# Altium PCB RemoteIMU.PcbDoc
Units mil, origin at the board's own origin, x right, y up, seen from the top; angles counter-clockwise.
Board outline 1063.02 x 728.38 mil, 4 copper layers (L1, L2, L3, L4), stack 64.6 mil thick; 19 components, 23 nets, 166 pads, 65 vias.
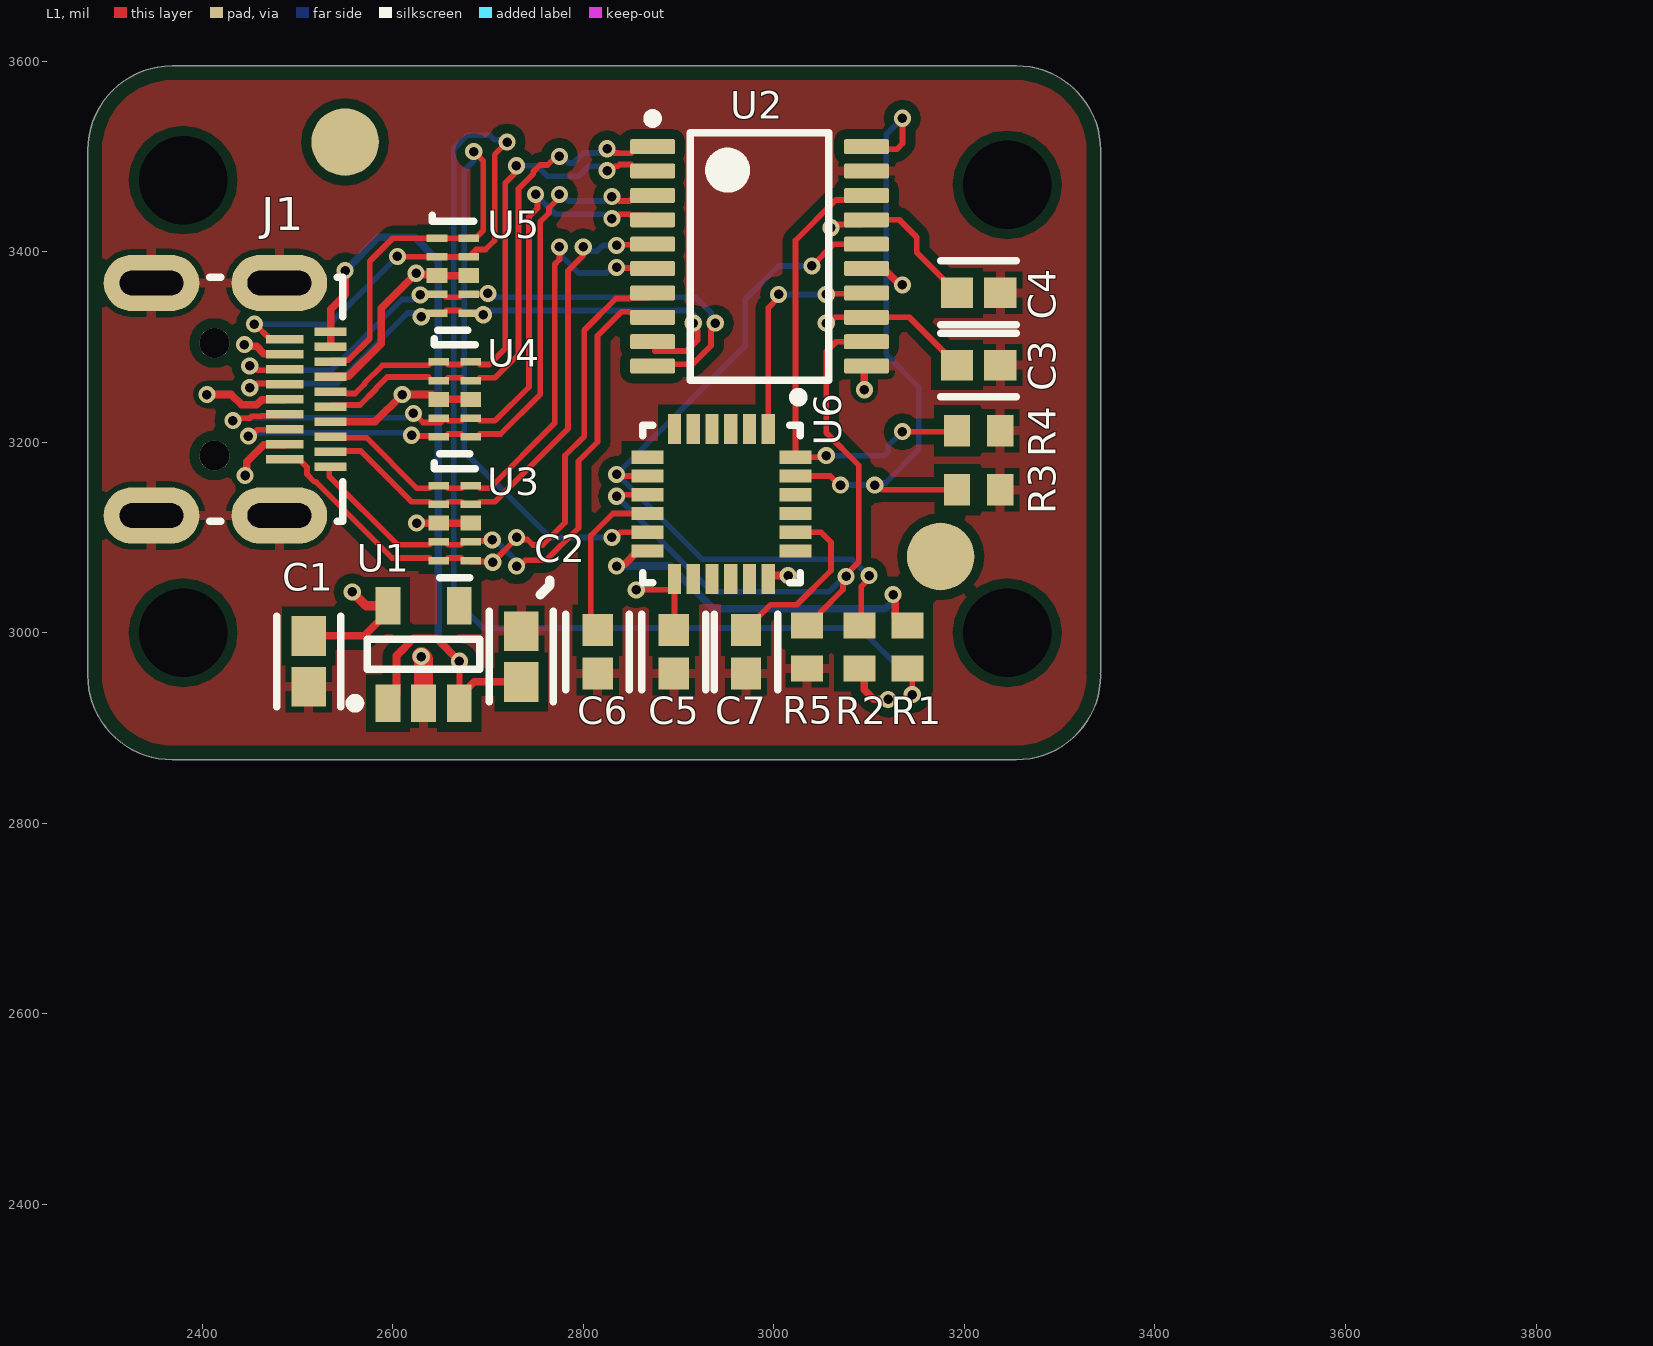
[diagram p0: L1 view]
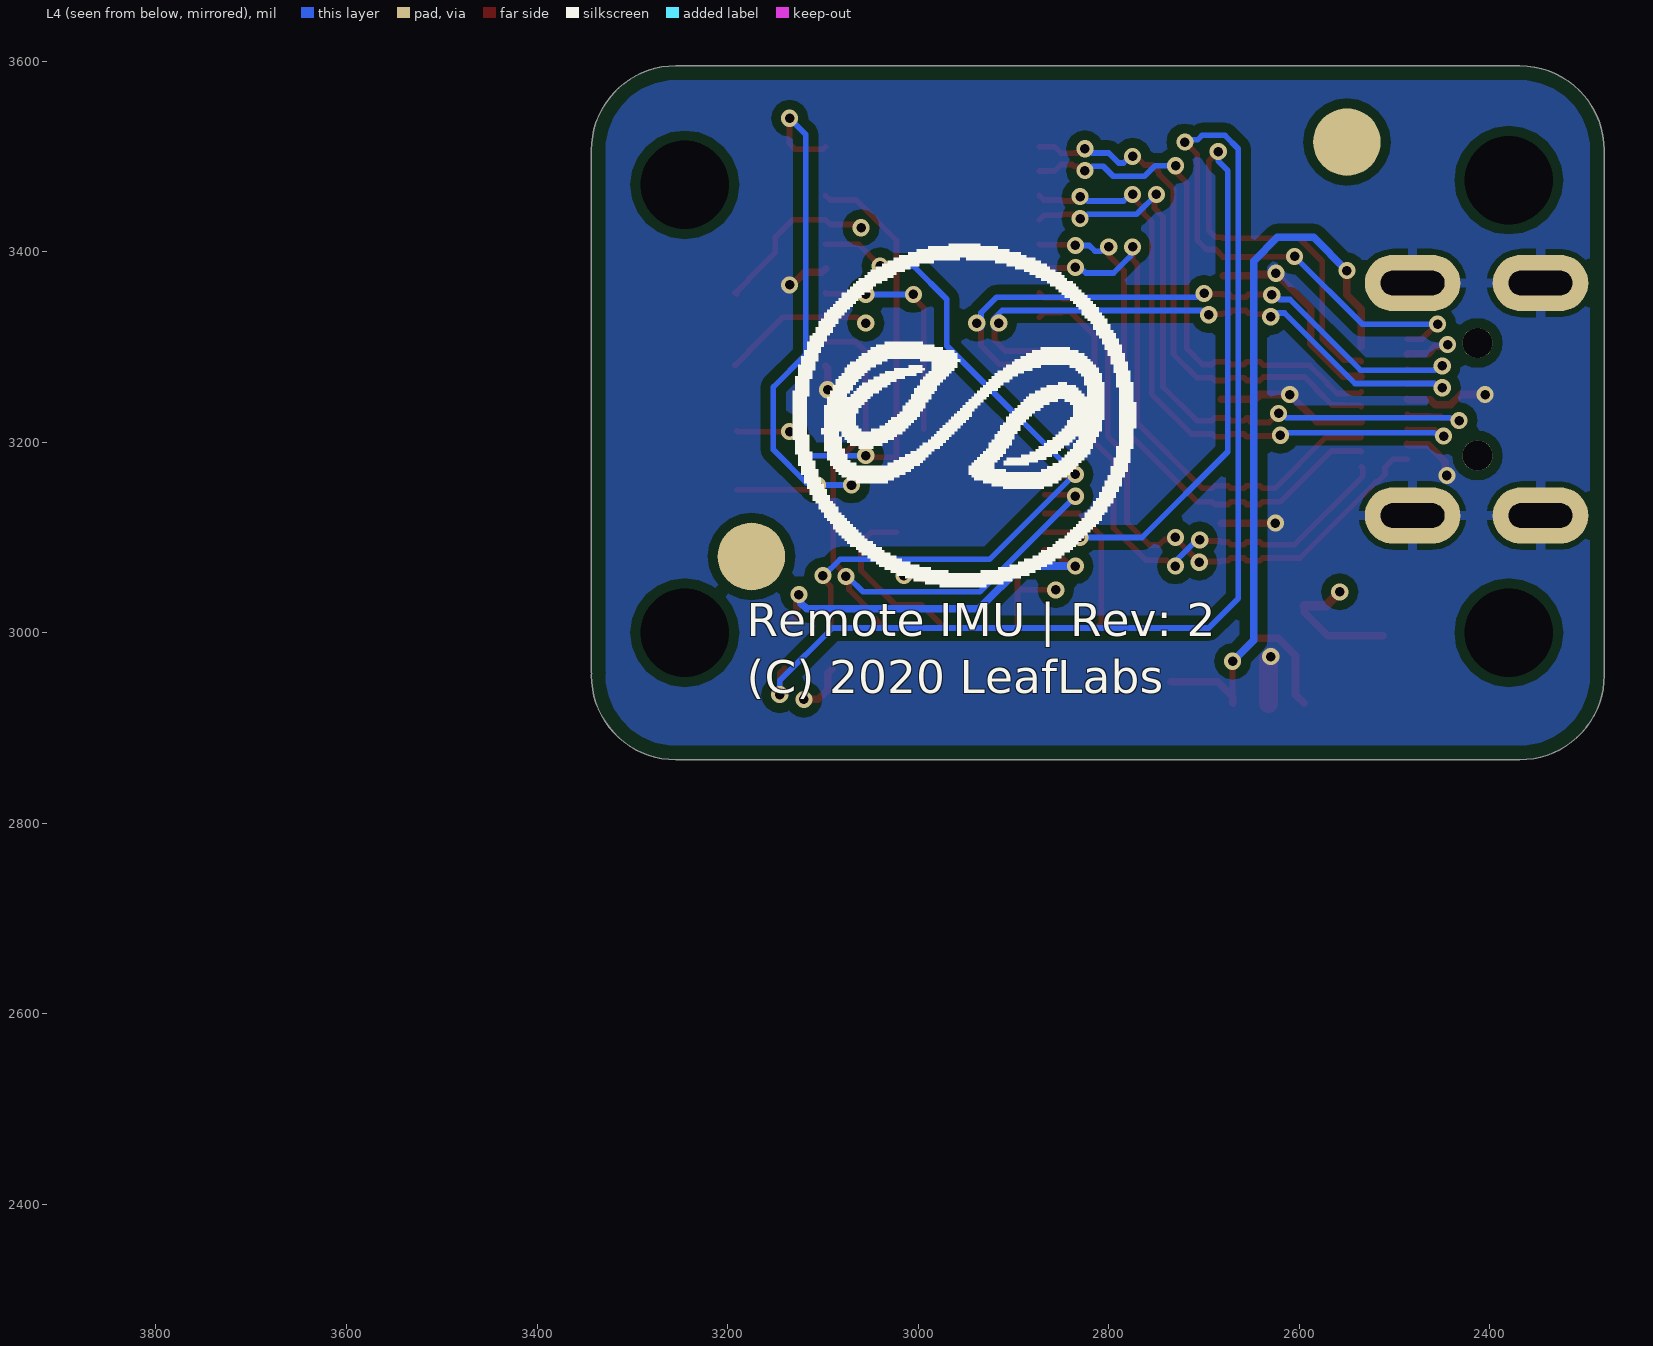
[diagram p1: L4 view, seen from below]
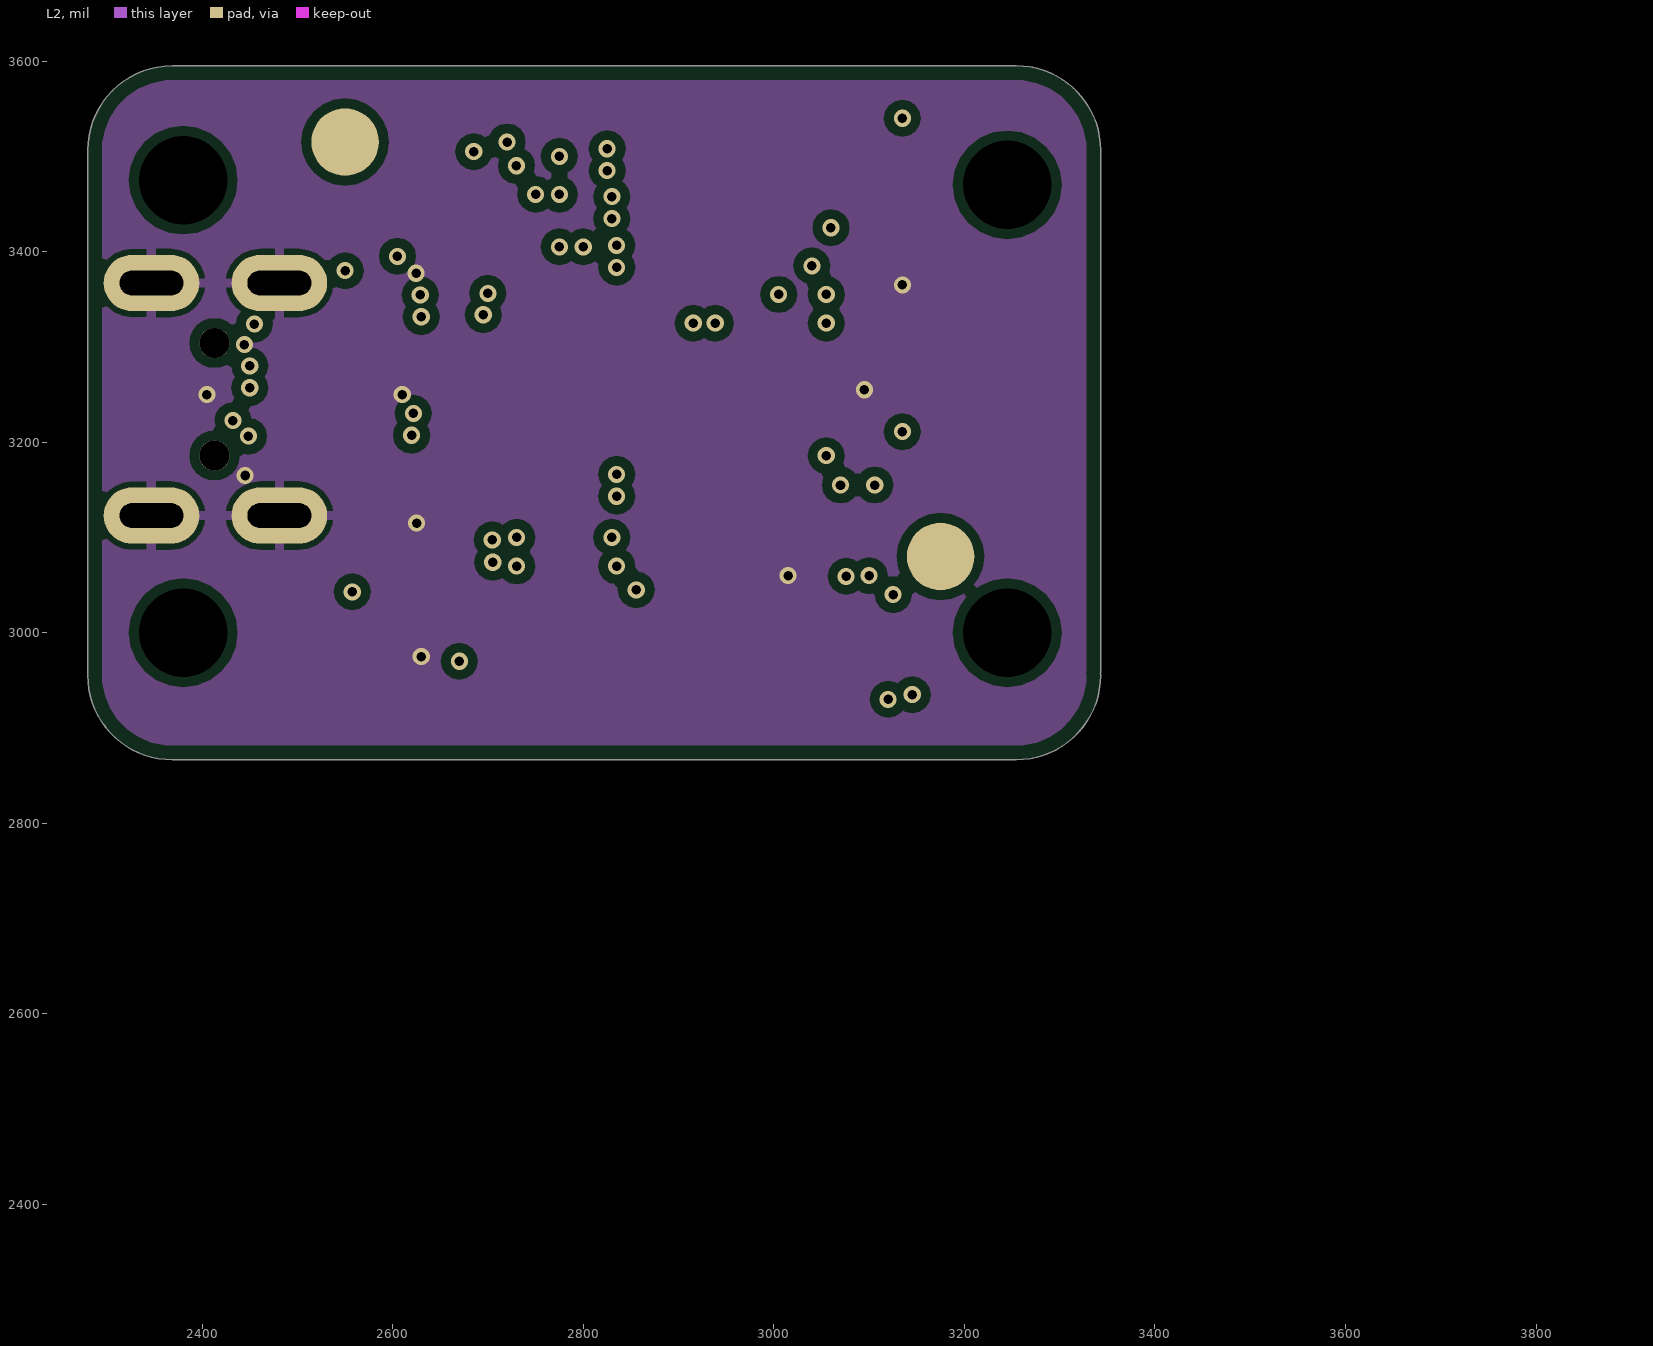
[diagram p2: L2]
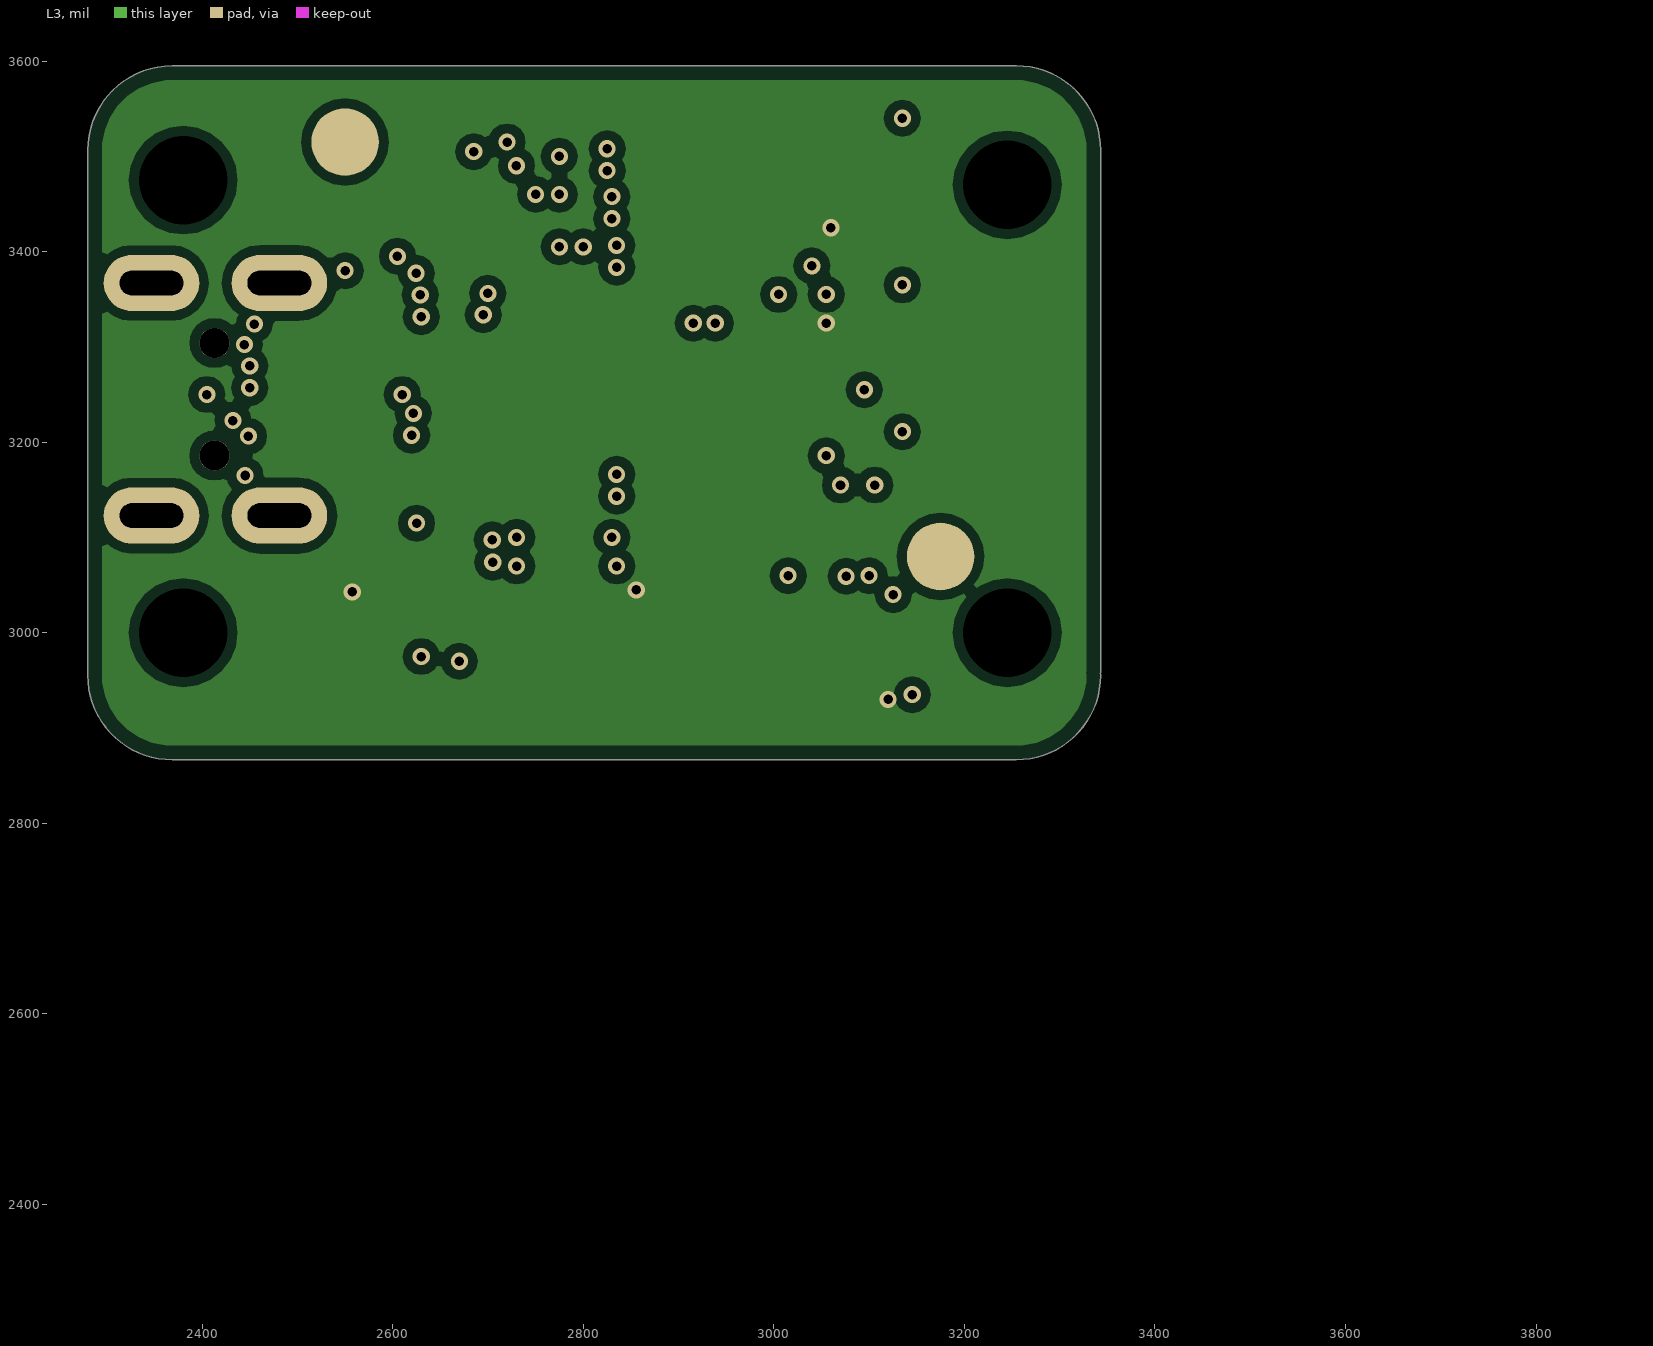
[diagram p3: L3]
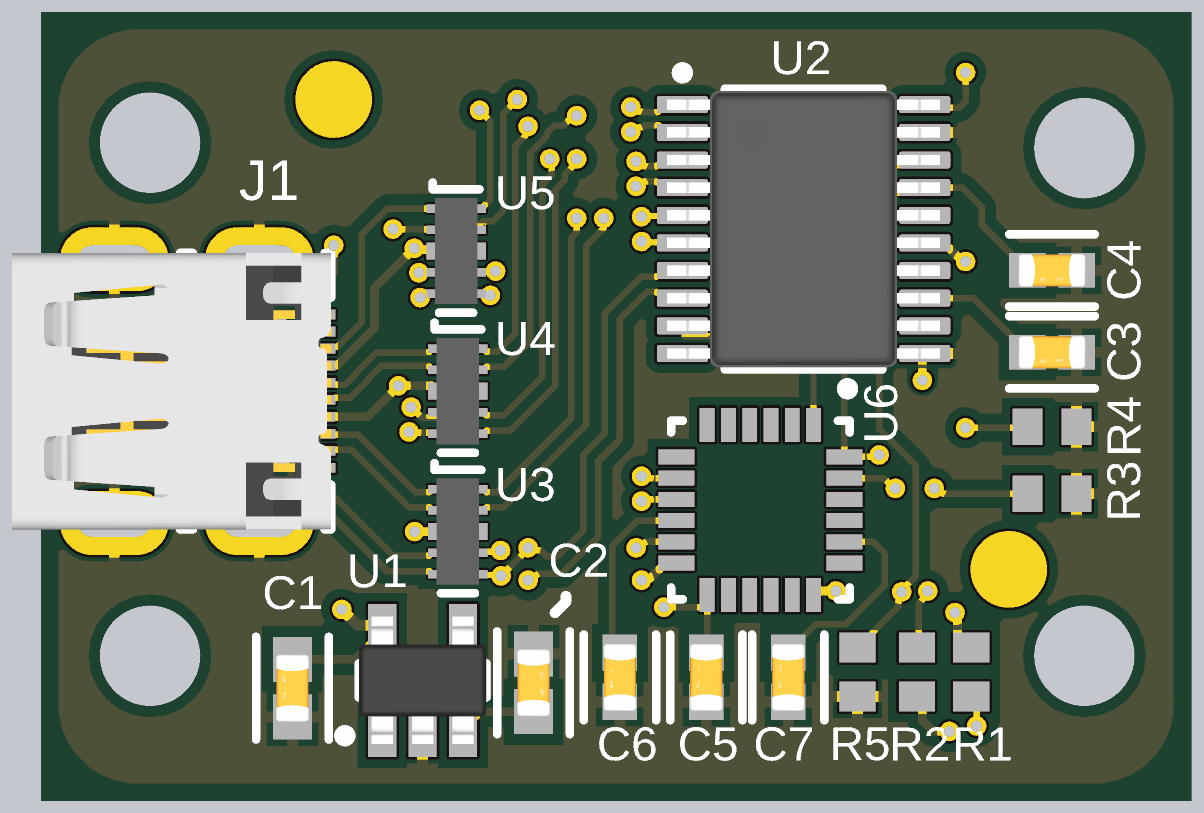
[diagram p4: 3D render of the assembled board from above, using the file's embedded part models]

## Layer stack, top to bottom
Top Solder: solder mask 0.1, Solder Resist, Dk 1
L1: signal copper 1.4
Prepeg0: dielectric 6.7, FR408, Dk 3.66
L2: signal copper 0.7
Core: dielectric 47, FR-4, Dk 3.66
L3: signal copper 0.7
Prepeg1: dielectric 6.7, FR408, Dk 3.66
L4: signal copper 1.4
Bottom Solder: solder mask 0.1, Solder Resist, Dk 1

## Board outline
2279.99,2955.24 cw(c2289.84,2955.24) 2280.18,2957.2 cw(c2289.85,2959.17) 2279.98,2959.17 2279.98,3502.42 cw(c2289.81,3502.48) 2280.18,3504.45 cw(c2289.58,3506.39) 2279.99,3506.42 cw(c2368.58,3506.42) 2368.58,3595.01 cw(c2368.59,3585.25) 2370.55,3594.82 cw(c2372.51,3585.24) 2372.52,3595.01 3254.41,3595.01 cw(c3254.41,3506.42) 3343.01,3506.42 3343.01,2959.23 cw(c3333.28,2959.16) 3342.81,2957.2 cw(c3333.26,2955.25) 3343.01,2955.24 cw(c3254.41,2955.23) 3254.41,2866.64 cw(c3254.41,2876.49) 3252.44,2866.84 cw(c3250.47,2876.48) 3250.47,2866.64 2372.52,2866.64 cw(c2372.52,2876.49) 2370.55,2866.84 cw(c2368.58,2876.48) 2368.58,2866.64 cw(c2368.58,2955.24)

## Design rules (kind name [scope] priority, off if disabled: settings)
BoardOutlineClearance [All] p1: gap=15 ignorepadtopadclearanceinfootprint=FALSE
Clearance "Clearance Polygons" [InPolygon] p1: gap=10 ignorepadtopadclearanceinfootprint=FALSE except(0: Arc-Hole Track-Hole SMDPad-Hole THPad-Hole Via-Hole Fill-Hole Poly-Hole Region-Hole Text-Hole)
Clearance [All] p2: gap=5 ignorepadtopadclearanceinfootprint=FALSE except(0: Arc-Hole Track-Hole SMDPad-Hole THPad-Hole Via-Hole Fill-Hole Poly-Hole Region-Hole Text-Hole)
ComponentClearance "HM-TRP & UFL" [InComponent('X1') vs InComponent('U1')] p1: gap=0 collisioncheckmode=3 verticalgap=0 showdistances=FALSE
ComponentClearance [All] p2: gap=1 collisioncheckmode=3 verticalgap=1 showdistances=FALSE
DiffPairsRouting [All] p1: maxlimit=393.7 minlimit=6 mostfreqgap=8 toplayer_minwidth=6 toplayer_maxwidth=15 toplayer_prefwidth=8 midlayer1_minwidth=6 midlayer1_maxwidth=15 midlayer1_prefwidth=8 midlayer2_minwidth=6 midlayer2_maxwidth=15 midlayer2_prefwidth=8 bottomlayer_minwidth=6 bottomlayer_maxwidth=15 bottomlayer_prefwidth=8 maxuncoupledlength=500
HoleSize [All] p1: absolutevalues=TRUE maxlimit=265 minlimit=10 maxpercent=80.000 minpercent=20.000
HoleToHoleClearance [All] p1: gap=10 allowstackedmicrovias=FALSE
MinimumAnnularRing [All] p1: minimumring=4
MinimumSolderMaskSliver [All] p1: minsoldermaskwidth=0
PlaneClearance [All] p1: clearance=10
PlaneConnect [All] p1: planeconnectstyle=Relief reliefexpansion=4 reliefentries=4 reliefconductorwidth=6 reliefairgap=6
PolygonConnect "Via connect style" [isVia] p1: connectstyle=Direct reliefconductorwidth=10 reliefentries=4 polygonreliefangle="90 Angle" airgapwidth=10
PolygonConnect [All] p2: connectstyle=Relief reliefconductorwidth=10 reliefentries=4 polygonreliefangle="90 Angle" airgapwidth=6
RoutingCorners [All] p1: cornerstyle=45-Degree minsetback=49.21 maxsetback=49.21
RoutingLayers [All] p1: top layer_v5=TRUE mid layer 1_v5=FALSE mid layer 2_v5=FALSE bottom layer_v5=TRUE
RoutingVias [All] p1: holewidth=12 width=22 viastyle="Through Hole" minholewidth=10 minwidth=18 maxholewidth=100 maxwidth=114
SilkToSilkClearance [All] p1: silktosilkclearance=0
SilkToSolderMaskClearance [IsPad] p1: minsilkscreentomaskgap=5 clearancetoexposedcopper=TRUE
SolderMaskExpansion [All] p1: expansion=2.5 istentingtop=FALSE
Width GND [InNet('GND')] p1: maxlimit=30 minlimit=8 preferedwidth=20 minimp=50.000000 maximp=50.000000 favimp=50.000000
Width Power [InNetClass('Power')] p2: maxlimit=40 minlimit=20 preferedwidth=30
Width 3V3 [InNetClass('3V3')] p3: maxlimit=30 minlimit=10 preferedwidth=20
Width [All] p4: maxlimit=400 minlimit=6 preferedwidth=8
19 further rules are at their usual default settings.

## Classes and differential pairs
differential pair D0: +D0_P -D0_N
differential pair D1: +D1_P -D1_N
differential pair D2: +D2_P -D2_N
differential pair REFCLK: +REFCLK_P -REFCLK_N
differential pair D3: +D3_P -D3_N

## Components (designator, comment, footprint, x,y, rotation, side; value= is the part's Value field where it differs from the comment)
C1 "1uF" FP-CC0603-DA-IPC_B 2511.83,2970 r270 top
C2 "1uF" FP-CC0603-DA-IPC_B 2735,2975 r90 top
C3 "0.1uF" FP-CC0603-DA-IPC_C 3215,3280.96 r0 top value="100 nF"
C4 "0.1uF" FP-CC0603-DA-IPC_C 3215,3356.77 r0 top value="100 nF"
C5 "0.1uF" FP-CC0603-DA-IPC_C 2895,2980 r270 top value="100 nF"
C6 "0.1uF" FP-CC0603-DA-IPC_C 2815,2980 r270 top value="100 nF"
C7 "2.2nF" FP-CC0603-DA-IPC_C 2970.81,2980 r270 top
J1 "685119248123" 685119248123 2400,3245 r270 top
R1 "22R" RESC1609X50X30LL10T20 3140.22,2985 r270 top
R2 "4.7k" RESC1609X50X30LL10T20 3090,2985 r270 top
R3 "4.7k" RESC1609X50X30LL10T20 3215,3150 r180 top
R4 "4.7k" RESC1609X50X30LL10T20 3215,3212.03 r180 top
R5 "4.7k" RESC1609X50X30LL10T20 3035,2985 r90 top
U1 "MIC5504-3.3YM5-TR" SOT-23-M5_V 2632.37,2977.18 r90 top
U2 "SN65LVDT14PW" PW0020A_L 2985,3395 r0 top
U3 "TPD4E02B04DQAR" DQA0010A 2665,3115 r0 top value=Value
U4 "TPD4E02B04DQAR" DQA0010A 2665,3245 r0 top value=Value
U5 "TPD4E02B04DQAR" DQA0010A 2663.27,3374.68 r0 top value=Value
U6 "MPU-6000" QFN-24_NoPad 2945,3135 r270 top

## Footprints (in the part's own frame and the unit in brackets; to place one, negate y for a bottom-side part, rotate by r counter-clockwise, add the part's x,y. Pads: shape width x height; smd on the part's side, far side on the other; paste and mask are expansions set on the pad)
685119248123 [mm] "Micro HDMI Horizontal SMT"
  rect 0.23x0.85 smd: 1(1.8,3.425) 3(1.4,3.425) 5(1,3.425) 7(0.6,3.425) 9(0.2,3.425) 11(-0.2,3.425) 13(-0.6,3.425) 15(-1,3.425) 17(-1.4,3.425) 19(-1.8,3.425)
  rect 0.23x1 smd: 2(1.6,2.2) 4(1.2,2.2) 6(0.8,2.2) 8(0.4,2.2) 10(0,2.2) 12(-0.4,2.2) 14(-0.8,2.2) 16(-1.2,2.2) 18(-1.6,2.2)
  round 0.81 hole 0.81 unplated: MH1(-1.5,0.33) MH2(1.5,0.33)
  oval 1.5x2.55 hole 0.65 slot 1.7 at 90 deg: Shell(-3.1,2.06) Shell(-3.1,-1.35) Shell(3.1,2.06) Shell(3.1,-1.35)
  silkscreen extent -3.25,0.2 3.25,3.75, body extent -3.25,-3.75 3.25,3.75, height 2.99
DQA0010A [mm]
  rect 0.55x0.2 smd paste+0 mask+0.051: 1(-0.425,1) 2(-0.425,0.5) 4(-0.425,-0.5) 5(-0.425,-1) 6(0.425,-1) 7(0.425,-0.5) 9(0.425,0.5) 10(0.425,1)
  rect 0.55x0.4 smd paste+0 mask+0.051: 3(-0.425,0) 8(0.425,0)
  silkscreen extent -0.55,-1.45 0.55,1.61, body extent -0.5,-1.25 0.5,1.25, height 0.55
FP-CC0603-DA-IPC_B [mil]
  rect 41.66x35.91 smd paste+0 mask+0: 1(-26.65,0) 2(26.65,0)
  silkscreen extent -47,-34 47,34, body extent -57,-28 57,28, height 10
FP-CC0603-DA-IPC_C [mil]
  rect 33.79x31.97 smd paste+0 mask+0: 1(-22.72,0) 2(22.72,0)
  silkscreen extent -40,-33 40,33, body extent -44,-22 44,22, height 10
PW0020A_L [mm] "SOP, 20-Leads, Body 6.6x4.5mm, Pitch 0.65mm, IPC High Density"
  rrect25% 1.2x0.4 smd: 1(-2.85,2.925) 2(-2.85,2.275) 3(-2.85,1.625) 4(-2.85,0.975) 5(-2.85,0.325) 6(-2.85,-0.325) 7(-2.85,-0.975) 8(-2.85,-1.625) 9(-2.85,-2.275) 10(-2.85,-2.925) 11(2.85,-2.925) 12(2.85,-2.275) 13(2.85,-1.625) 14(2.85,-0.975) 15(2.85,-0.325) 16(2.85,0.325) 17(2.85,0.975) 18(2.85,1.625) 19(2.85,2.275) 20(2.85,2.925)
  silkscreen extent -2.97,-3.3 1.85,3.8, body extent -3.21,-3.25 3.21,3.25, height 1
QFN-24_NoPad [mm] "QFN, 24-Leads, Body 4.00x4.00mm, Pitch 0.50mm"
  rect 0.8x0.35 smd: 1(-2,1.25) 2(-2,0.75) 3(-2,0.25) 4(-2,-0.25) 5(-2,-0.75) 6(-2,-1.25) 13(2,-1.25) 14(2,-0.75) 15(2,-0.25) 16(2,0.25) 17(2,0.75) 18(2,1.25)
  rect 0.35x0.85 smd: 7(-1.25,-1.975) 8(-0.75,-1.975) 9(-0.25,-1.975) 10(0.25,-1.975) 11(0.75,-1.975) 12(1.25,-1.975) 19(1.25,1.975) 20(0.75,1.975) 21(0.25,1.975) 22(-0.25,1.975) 23(-0.75,1.975) 24(-1.25,1.975)
  silkscreen extent -2.97,-2.1 2.1,2.18, body extent -2,-2 2,2, height 0.95
RESC1609X50X30LL10T20 [mm] "Chip Resistor, 2-Leads, Body 1.55x0.85mm, IPC High Density"
  rect 0.7x0.85 smd: 1(-0.575,0) 2(0.575,0)
  body extent -0.82,-0.48 0.82,0.48, height 0.5
SOT-23-M5_V [mm] "SOT-23, 5-Leads, Body 3x1.7mm, Pitch 0.95mm"
  rect 1x0.66 smd: 1(-1.3,0.95) 2(-1.3,0) 3(-1.3,-0.95) 4(1.3,-0.95) 5(1.3,0.95)
  silkscreen extent -1.42,-1.5 0.4,1.95, body extent -1.5,-1.5 1.5,1.5, height 1.45

## Part data
C1 C2: library part CAP-0603-1uF, "CAP CER 1UF X7R 0603", Supplier Part Number 1=1276-1036-1-ND, Category=Cap, ComponentLink2Description=Datasheet, ComponentLink2URL=http://www.yageo.com/documents/recent/UPY-GPHC_X7R_6.3V-to-50V_18.pdf, Device Class L2=Capacitors, Supplier 1=Digi-Key
C3 C4 C5 C6: library part CAP-0603-0.1uF, "CAP CER 0.1UF 16V X7R 0603", Capacitance="100 nF", Manufacturer=YAGEO, Manufacturer Part Number=CC0603KRX7R7BB104, Package=CC0603-DA, Supplier Part Number 1=311-1088-1-ND, Temperature="-55°C to +125°C", Temperature Characteristic=X7R, Temperature Coefficient=15%, Temperature Range High=+125°C, Temperature Range Low=-55°C, Tolerance=0.1, Voltage="16 V", Automotive=No, Category=Cap, ComponentLink2Description=Datasheet, ComponentLink2URL=http://www.yageo.com/documents/recent/UPY-GPHC_X7R_6.3V-to-50V_18.pdf, Device Class L1="Passive Components", Device Class L2=Capacitors, Device Class L3="Ceramic Capacitors", Digikey Description="CAP CER 0.1UF 16V X7R 0603", Footprint Url=http://www.yageo.com/exep/pages/download/literatures/UPY-C_GEN_24.pdf, Height=0.9mm, Lead Free=Yes, Material=Ceramic, Mouser Description="Multilayer Ceramic Capacitor, CC Series, 0.1 - F, - 10%, X7R, 16 V, 0603 [1608 Metric]", Octopart=https://octopart.com/cc0603krx7r7bb104-yageo-192941, RoHS=TRUE, Supplier 1=Digi-Key, Voltage Rating="16 V"
C7: library part CAP-0603-2.2nF, "CAP CER 2.2nF 50V X7R 0603", Supplier Part Number 1=311-1081-1-ND, Temperature Range High=+125°C, Tolerance=0.1, Voltage Rating="50 V", Category=Cap, ComponentLink2Description=Datasheet, ComponentLink2URL=http://www.yageo.com/documents/recent/UPY-GPHC_X7R_6.3V-to-50V_18.pdf, Device Class L2=Capacitors, Supplier 1=Digi-Key
J1: "Micro HDMI Type D Receptacle WR-COM, Horizontal, SMT", Contact Resistance=10mOhm, Manufacturer="Wurth Elektronik", Operating Temperature=-40to85degC, Rated Current=0.5A, Supplier Part Number 1=732-5254-1-ND, Working Voltage=40VAC, Connector Type=MicroHDMITypeD, Datasheet URL=https://katalog.we-online.de/em/datasheet/685119248123.pdf, Gender=Receptacle, Manufacturer URL=http://www.we-online.de, Mounting Technology=SMT, Orientation=Horizontal, Package Reference=685119248123, Packaging=TapeandReel, Part Number=685119248123, Publisher=WurthElektronik, Supplier 1=Digi-Key
R1: library part RES-0603-22R, "Resistor 0603 22 Ohm", Supplier Part Number 1=CR0603-JW-220ELFCT-ND, Supplier 1=Digi-Key
R2 R3 R4 R5: library part RES-0603-4.7k, "Resistor 0603 4.7k Ohm", Supplier Part Number 1=CR0603-JW-472ELFCT-ND, Supplier 1=Digi-Key
U1: "Single LDO, 2.5 to 5.5 V, Fixed Out 3.3 V, 0.3 A, -40 to 125 degC, 5-Pin SOT-23 (M5), RoHS, Tape and Reel", Case\/Package=SOT-23, Dropout Voltage=160mV, Manufacturer=Microchip, Max Input Voltage=5.5V, Max Operating Temperature=125degC, Min Current Limit=400mA, Min Input Voltage=2.5V, Min Operating Temperature=-40degC, Nominal Output Voltage=3.3V, Output Current=300mA, Package Description="5-Pin Small Outline Transistor, Body 1.6 x 2.9 mm, Pitch 0.95 mm", Supplier Part Number 1=576-4764-1-ND, Datasheet URL=http://ww1.microchip.com/downloads/en/DeviceDoc/MIC550X.pdf, Datasheet Version="Rev. 2.3, 04/2015", Lead Free=LeadFree, Manufacturer URL=http://www.microchip.com/, Mount=SurfaceMount, Mounting Technology=SurfaceMount, Number of Pins=5, Number of Regulators=1, Output Voltage=3.3V, Package Reference=SOT-23, Packaging=CutTape, REACH SVHC=NoSVHC, RoHSCompliant=True, Supplier 1=Digi-Key
U2: "SPI<>LVDS Transceiver, 1 Tx and 4 Rx, -55 to +125 degC, 20-pin TSSOP (PW), Green (RoHS & no Sb/Br)", Manufacturer="Texas Instruments", Supplier Part Number 1=296-12736-5-ND, ComponentLink1Description="Manufacturer URL", ComponentLink1URL=http://www.ti.com/, ComponentLink2Description=Datasheet, ComponentLink2URL=http://www.ti.com/general/docs/lit/getliterature.tsp?genericPartNumber=SN65LVDT14-EP&fileType=pdf, ComponentLink3Description="URL Link1", ComponentLink3URL=SamplesURL:http://www.ti.com/product/sn65lvdt14-ep#samples, DatasheetVersion=SCES633, Eco-Plan="Green (RoHS & no Sb/Br)", ESD HBM(kV)=12, ICC(Max)(mA)=25, Input Signal="LVDS, LVTTL", Mounting Technology="Surface Mount", No. of Rx=4, No. of Tx=1, Output Signal="LVDS, LVTTL", PackageDescription="20-Pin Plastic Thin Small Outline Package 6.5 x 4.4 mm Body ,0.65 mm Pitch", PackageReference=PW0020A, PackageVersion="revG, Feb-2011", PartNumber=SN65LVDT14PW, Part-to-Part Skew(Max)(ps)=1000, Signaling Rate(Mbps)=125, SubFamily="LVDS PHY (<800Mbps)", Supplier 1=Digi-Key
U3 U4 U5: "4 Channel TVS Avalanch diode for USB3/HDMI2.0 protection", Manufacturer="Texas Instruments", Supplier Part Number 1=296-43875-1-ND, CompType=IC, Copyright="Copyright (C) 2018 Accelerated Designs. All rights reserved", MountType=SMT, PackageReference=DQA0010A, Part Number=TPD4E02B04DQAR, PartNumber=TPD4E02B04DQAR, PIN_COUNT=10, RefDes=RefDes, RoHS=Y, Supplier 1=Digi-Key, Type=DEV
U6: "3-Axis Gyroscope 3-Axis Accelerometer Motion Processing Unit with I2C and SPI, 2.5, 3 or 3.3 V, -40 to 85 degC, 24-Pin QFN, RoHS, Tape and Reel", Manufacturer=InvenSense, Operating Temperature=-40degC~85degC(TA), Package Description="24-Pin Quad Flat No-lead Package, Body 4 x 4 mm, Pitch 0.5 mm", Package Reference=QFN-24, Standard Package=5,000, Supplier Part Number 1=1428-1005-1-ND, Category=Sensors,Transducers, Datasheet URL=https://www.invensense.com/wp-content/uploads/2015/02/MPU-6000-Datasheet1.pdf, Datasheet Version="Rev. 3.4, 08/2013", Family=Multifunction, Featured Product=MPU60006AxisIntegratedSPISolution, Manufacturer URL=http://www.invensense.com/, Online Catalog=MPU-6000™Series, Other Names="1428-1005-2 / MPU6000", Output Type=I²C,SPI, Sensor Type=Accelerometer,Gyroscope,3Axis, Supplier 1=Digi-Key

## Free pads (board coordinates)
  round 13.78 on Mech2: 1(2289.84,2325.31) 1(2289.84,2404.06) 1(2289.84,2404.06) 1(2289.84,2404.06) 1(2289.84,2870.59) 1(2368.58,2377.81) 1(2368.58,2430.3) 1(2543.78,2404.06) 1(3059.5,2404.06) 1(3254.41,2377.81) 1(3254.41,2430.3) 1(3333.15,2325.31) 1(3333.15,2404.06) 1(3333.15,2404.06) 1(3333.15,2404.06) 1(3333.15,2870.59) 1(3342.99,2876.5) 1(3342.99,3585.16) 1(3759.66,2955.24) 1(3759.66,3506.42) 1(3785.91,2876.5) 1(3785.91,2876.5) 1(3785.91,2876.5) 1(3785.91,3047.23) 1(3785.91,3434.43) 1(3785.91,3585.16) 1(3785.91,3585.16) 1(3785.91,3585.16) 1(3812.15,2955.24) 1(3812.15,3506.42) 1(3864.65,2876.5) 1(3864.65,3585.16)
  round 70.87 hole 93 unplated: 3(2380,3000) 3(2380,3475) 3(3245,3000) 3(3245,3470)
  round 70.87 all layers, no hole: Fiducial(2550,3515) Fiducial(3175,3080)

## Via types
v1: diameter 18, hole 10, L1 to L4, 65 vias

## Nets (pads, with @x,y where several pads share a name; then routed paths per layer and width w, separated by ;. In a path a pad name is that pad's centre, name@x,y a point inside that pad or via, vN(x,y) a via of type N, cw(c..) or ccw(c..) an arc to the next point about the centre after c; other vN are vias at no path point)
3v3: C1.1 C3.1 C4.1 C5.1 R2.2 U1.5 U2.13 U2.17 U6.13 | length 633.5
  L1 w6: v1(2855.63,3045) 2891.9,3045 U6.13@2895.79,3048.89 ; C5.1 2895.79,3003.5 U6.13@2895.79,3048.89 ; U6.13 U6.13@2895.79,3048.89 ; v1(3055,3325) 3058.25,3325 3064.27,3331.02 U2.13 3142.22,3331.02 3178.39,3294.85 3178.39,3293.94 3191.38,3280.96 C3.1 ; v1(3060,3425) 3063.25,3425 3066.76,3428.51 3092.33,3428.51 U2.17 3131.61,3433.39 3150,3415 3150,3399.05 3178.39,3370.66 3178.39,3369.76 3191.38,3356.77 C4.1 C4.1@3190.67,3355.16
  L1 w8: C1.1 2569.96,2996.65 2594.97,3021.67 U1.5 ; R2.2 3095,2957.36 3095,2940 3105,2930 v1(3120,2930)
  L1 w10: v1(2557.59,3042.9) 2572.12,3028.36 U1.5
+5: C2.1 J1.17 J1.19 U1.1 U1.3 | length 890.7
  L1 w6: U1.3@2670,2932.92 v1(2670,2970)
  L1 w8: J1.17 J1.19 2534.84,3339.49 2550,3354.65 v1(2550,3380) ; U1.1 2603.96,2934.99 2603.96,2975.83 2622.13,2994 2646,2994 v1(2670,2970) ; U1.3 2669.77,2932.69 2670,2932.92 2685.43,2948.35 C2.1
  L4 w8: v1(2550,3380) 2585,3415 2623,3415 2648,3390 2648,2992 v1(2670,2970)
D0_N: J1.5 U2.6 U3.1 U3.10 | length 594.3
  L1 w6: J1.5 2535.72,3204.76 2572.34,3204.76 2625.57,3151.53 2638.54,3151.53 2641.38,3154.37 U3.1 2655.16,3154.37 2658,3151.53 2672,3151.53 2674.84,3154.37 U3.10 2688.62,3154.37 2691.46,3151.53 2701.56,3151.53 2770,3219.97 2770,3386.75 2775,3391.75 v1(2775,3405) ; v1(2835,3383.5) 2835.65,3382.85 2872.15,3382.85 U2.6
  L4 w6: v1(2775,3405) 2777,3403 2777,3395.47 2794.97,3377.5 2824.01,3377.5 2825.78,3379.27 2827.52,3379.27 2831.75,3383.5 v1(2835,3383.5)
D0_P: J1.3 U2.5 U3.2 U3.9 | length 583.2
  L1 w6: J1.3 2535.72,3190.76 2566.54,3190.76 2619.77,3137.53 2638.54,3137.53 2641.38,3134.69 U3.2 2655.16,3134.69 2658,3137.53 2672,3137.53 2674.84,3134.69 U3.9 2688.62,3134.69 2691.46,3137.53 2707.36,3137.53 2784,3214.17 2784,3380 2800,3396 v1(2800,3405) ; v1(2835,3406.5) 2835.65,3407.15 2872.15,3407.15 U2.5
  L4 w6: v1(2800,3405) 2803.25,3405 2807.75,3400.5 2814.49,3400.5 2820.49,3406.5 v1(2835,3406.5)
D1_N: J1.8 U2.4 U4.4 U4.7 | length 739.8
  L1 w6: v1(2432.34,3222.66) 2434.64,3224.95 2449.88,3224.95 2452.05,3227.12 2462.43,3227.12 2463.03,3227.72 2485.09,3227.72 J1.8 ; v1(2621.66,3230.18) 2622.06,3230.18 2631.67,3220.56 2650.39,3220.56 2653.9,3224.08 2653.9,3225.32 2655.16,3225.32 2658,3222.47 2672,3222.47 2674.84,3225.32 U4.7 2688.62,3225.32 2691.46,3222.47 2707.47,3222.47 2743,3258 2743,3436.49 2752.03,3445.51 2752.03,3457.97 v1(2750,3460) ; v1(2830,3434.68) 2833.25,3434.68 2837.75,3439.18 2848.66,3439.18 2849.58,3438.26 2867.92,3438.26 U2.4
  L4 w6: v1(2432.34,3222.66) 2434.64,3224.95 2441.1,3224.95 2441.86,3225.71 2613.95,3225.71 2618.41,3230.18 v1(2621.66,3230.18) ; v1(2750,3460) 2770.82,3439.18 2822.25,3439.18 2826.75,3434.68 v1(2830,3434.68)
D1_P: J1.6 U2.3 U4.5 U4.6 | length 696.3
  L1 w6: v1(2448.6,3206.39) 2451.2,3206.39 2457.93,3213.12 2486.23,3213.12 J1.6 ; v1(2619.77,3207.25) 2620.47,3206.56 2647.34,3206.56 U4.5 2655.16,3205.63 2658,3208.47 2672,3208.47 2674.84,3205.63 U4.6 2688.62,3205.63 2691.46,3208.47 2713.27,3208.47 2755,3250.2 2755,3431.51 2764.03,3440.54 2764.03,3445.78 2775,3456.75 v1(2775,3460) ; v1(2830,3457.68) 2833.25,3457.68 2837.75,3453.18 2848.66,3453.18 2849.58,3454.1 2867.92,3454.1 U2.3
  L4 w6: v1(2448.6,3206.39) 2450.9,3208.69 2456.81,3208.69 2458.12,3210 2613.78,3210 2616.53,3207.25 v1(2619.77,3207.25) ; v1(2775,3460) 2777.7,3460 2784.51,3453.18 2822.25,3453.18 2826.75,3457.68 v1(2830,3457.68)
D2_N: J1.11 U2.2 U4.1 U4.10 | length 566
  L1 w6: J1.11 2536.37,3251.35 2551.63,3251.35 2551.89,3251.08 2560.57,3251.08 2570.56,3261.07 2570.56,3262.03 2589.14,3280.61 2637.62,3280.61 2641.38,3284.37 U4.1 2655.16,3284.37 2658,3281.53 2672,3281.53 2674.84,3284.37 U4.10 2688.62,3284.37 2691.46,3281.53 2701.56,3281.53 2718,3297.97 2718,3471.84 2727.61,3481.45 2727.61,3487.8 v1(2729.9,3490.1) ; v1(2825,3485) 2828.25,3485 2832.75,3489.5 2836.54,3489.5 2838.4,3491.36 2850.25,3491.36 2857.05,3484.57 U2.2 U2.2@2871.93,3483.7
  L4 w6: v1(2729.9,3490.1) 2751.53,3490.1 2762.63,3479 2795.28,3479 2805.78,3489.5 2817.25,3489.5 2821.75,3485 v1(2825,3485)
D2_P: J1.9 U2.1 U4.2 U4.9 | length 569.9
  L1 w6: J1.9 2536.37,3238.65 2551.63,3238.65 2551.89,3238.92 2565.62,3238.92 2582.72,3256.02 2582.72,3256.99 2594.18,3268.44 2637.62,3268.44 2641.38,3264.69 U4.2 2655.16,3264.69 2658,3267.53 2672,3267.53 2674.84,3264.69 U4.9 2688.62,3264.69 2691.46,3267.53 2707.36,3267.53 2732,3292.17 2732,3466.04 2747.43,3481.47 2747.43,3483.75 2754.5,3490.82 2762.58,3490.82 2771.75,3500 v1(2775,3500) ; v1(2825,3508) 2828.25,3508 2832.75,3503.5 2836.54,3503.5 2836.68,3503.36 2850.25,3503.36 2857.05,3510.16 U2.1
  L4 w6: v1(2775,3500) 2777.51,3500 2784.51,3493 2789.49,3493 2799.99,3503.5 2817.25,3503.5 2821.75,3508 v1(2825,3508)
D3_N: J1.14 U2.10 U5.4 U5.7 | length 664.6
  L1 w6: v1@2457.75,3275.62 2485.74,3275.62 J1.14 ; v1(2628.85,3354.61) 2629.24,3355 2653.43,3355 2656.27,3352.16 2670.27,3352.16 2673.11,3355 U5.7 2680.57,3355.57 2699.32,3355.57 v1(2699.88,3356.13) ; U2.10@2875,3281 2875.72,3281.72 2914.51,3281.72 2934,3301.2 2934,3317.25 2938.5,3321.75 v1(2938.5,3325)
  L4 w6: v1(2450,3280.12) 2453.25,3280.12 2457.75,3275.62 2535.82,3275.62 2609.83,3349.63 2620.62,3349.63 ; v1(2699.88,3356.13) 2703.13,3356.13 2707.14,3352.12 2917.68,3352.12 2934,3335.8 2934,3320 2938.5,3324.5 v1(2938.5,3325)
D3_P: J1.12 U2.9 U5.5 U5.6 | length 610.8
  L1 w6: v1@2457.75,3261.62 2485.74,3261.62 J1.12 ; v1(2630,3331.64) 2633.25,3331.64 2635.99,3334.38 2645.6,3334.38 U5.5 2653.43,3335.31 2656.27,3338.16 2670.27,3338.16 2673.11,3335.31 U5.6 2680.83,3334.49 2694.17,3334.49 v1(2695,3333.66) ; 2875,3295.72 2908.72,3295.72 2920,3307 2920,3317.25 2915.5,3321.75 v1(2915.5,3325)
  L4 w6: v1(2450,3257.12) 2453.25,3257.12 2457.75,3261.62 2541.62,3261.62 2615.63,3335.63 v1@2622.88,3335.63 ; v1(2695,3333.66) 2698.25,3333.66 2702.71,3338.12 2911.88,3338.12 v1@2920,3330 ; v1(2915.5,3325) 2915.5,3324.5 v1@2920,3320
FSYNC: J1.15 U5.1 U5.10 U6.11 | length 902.8
  L1 w6: J1.15 2536.37,3285.9 2553.2,3285.9 2575.82,3308.52 2575.82,3389.86 2600.01,3414.05 U5.1 U5.10 2680.94,3414.99 2687.83,3414.99 2695,3422.16 2695,3495 v1(2685,3505) ; v1(2830,3100) 2833.25,3100 2838.72,3105.47 U6.11
  L4 w6: v1(2685,3505) 2685,3495 2675,3485 2675,3190 2765,3100 v1(2830,3100)
GND: C1.2 C2.2 C3.2 C4.2 C5.2 C6.2 C7.2 J1.4 J1.7 J1.10 J1.13 J1.16 J1.Shell R3.1 R4.1 R5.1 U1.2 U2.11 U2.15 U2.19 U3.3 U3.8 U4.3 U4.8 U5.3 U5.8 U6.18 | length 772.2
  L1 w8: v1(2405,3250) 2430.46,3250 2441.33,3239.12 2457.46,3239.12 2462.81,3244.47 2486.09,3244.47 J1.10 ; v1(2444.39,3302.43) 2446.3,3300.51 2457.15,3300.51 2464.89,3292.77 2486.09,3292.77 J1.16 ; v1(2445,3165) 2446.91,3166.91 2446.91,3179.25 2464.89,3197.23 2486.09,3197.23 J1.4 ; J1.7 2581.38,3221.38 v1(2610,3250) 2641.22,3250 2647.25,3243.98 U4.3 U4.8 ; J1.13 2535.37,3269.15 2553.61,3269.15 2587.82,3303.36 2587.82,3340.44 v1(2624.58,3377.21) 2625.85,3375.95 2645.27,3375.95 U5.3 U5.8 ; v1(2625,3115) U3.8 ; U6.18 2994.21,3057.11 2997.1,3060 v1(3015,3060) ; v1(3095,3255) 3095,3277.64 U2.11 ; U2.15 3101.08,3378.33 3118.96,3378.33 3132.29,3365 v1(3135,3365)
  L1 w20: v1(2630,2975) 2632.37,2972.63 U1.2
NetC6_1: C6.1 U6.10 | length 171
  L1 w6: C6.1 2808,3009.72 2808,3102.04 2831.12,3125.16 U6.10
NetC7_1: C7.1 U6.20 | length 186.9
  L1 w6: C7.1 2970.81,3003.62 2996.61,3029.42 3024.15,3029.42 3060,3065.27 3060,3095 3049.53,3105.47 U6.20
NetR1_1: R1.1 U6.12 | length 398.2
  L1 w8: v1(2835,3070) 2836.91,3071.91 2843.53,3071.91 2857.4,3085.79 U6.12 ; v1(3125.22,3040) 3125.22,3037.29 3127.49,3035.03 3127.49,3017.42 3137.27,3007.64 R1.1
  L4 w8: v1(2835,3070) 2891.21,3070 2936.21,3025 3117.15,3025 3123.31,3031.16 3123.31,3038.09 v1(3125.22,3040)
REFCLK: U2.14 U6.1 | length 238.6
  L1 w6: U6.1 2994.21,3340.96 3005,3351.75 v1(3005,3355) ; v1(3055,3355) 3055.81,3355.81 3096.4,3355.81 U2.14
  L4 w6: v1(3005,3355) v1(3055,3355)
REFCLK_N: J1.1 U2.8 U3.4 U3.7 | length 617.7
  L1 w6: J1.1 2533.47,3172.77 2533.47,3164.12 2605.12,3092.47 2638.54,3092.47 2641.38,3095.32 U3.4 2655.16,3095.32 2658,3092.47 2672,3092.47 2674.84,3095.32 U3.7 2682.67,3096.25 2703.24,3096.25 v1(2704.48,3097.49) ; v1(2730,3070) 2733.25,3070 2739.25,3076 2761,3076 2794.9,3109.9 2794.9,3180.1 2815,3200.2 2815,3311.65 2840.17,3336.82 2848.66,3336.82 2849.58,3335.9 2867.92,3335.9 U2.8
  L4 w6: v1(2704.48,3097.49) 2707.51,3097.49 2730,3075 v1(2730,3070)
REFCLK_P: J1.2 U2.7 U3.5 U3.6 | length 668.3
  L1 w6: J1.2 2501.77,3182.01 2510.11,3173.67 2510.11,3166.29 2518.08,3158.32 2519.47,3158.32 2599.32,3078.47 2638.54,3078.47 2641.38,3075.63 U3.5 2655.16,3075.63 2658,3078.47 2672,3078.47 2674.84,3075.63 U3.6 2682.56,3074.8 2704.17,3074.8 v1(2705,3073.97) 2730,3098.97 v1(2730,3100) 2732.12,3097.88 2741.34,3097.88 2747.22,3092 2757.2,3092 2780.9,3115.7 2780.9,3185.9 2801,3206 2801,3317.44 2834.38,3350.82 2848.66,3350.82 2849.58,3351.74 2867.92,3351.74 U2.7
SPI_CS: R2.1 U2.16 U6.8 | length 789.2
  L1 w6: v1(2835,3166.18) 2836.66,3164.53 U6.8 ; v1(3040,3385) 3062.8,3407.8 U2.16 ; R2.1@3091.77,3007.02 3091.77,3048.52 3100,3056.75 v1(3100,3060)
  L4 w6: v1(3040,3385) 3005,3385 2970,3350 2970,3301.18 v1(2835,3166.18) 2836.04,3166.18 2925.23,3077 3082.04,3077 3099.04,3060 v1(3100,3060)
SPI_INT: J1.18 R1.2 U5.2 U5.9 | length 1534
  L1 w6: v1(2454.86,3323.88) 2455.57,3323.88 2471.46,3307.99 J1.18 ; v1(2605,3395) 2605.32,3394.68 2646.22,3394.68 U5.2 U5.9 2687.75,3402.12 2697.45,3402.12 2707,3411.67 2707,3502 v1(2720,3515) ; R1.2 3145.22,2957.36 v1(3145.22,2935)
  L4 w6: v1(2454.86,3323.88) 2533.88,3323.88 v1(2605,3395) ; v1(2720,3515) 2717.7,3517.3 2706.75,3517.3 2702.04,3522 2677.96,3522 2664,3508.04 2664,3036 2695,3005 3090,3005 3145.22,2949.78 v1(3145.22,2935)
SPI_MISO: R5.2 U2.12 U6.9 | length 693.5
  L1 w6: v1(2835,3143.18) 2836.66,3144.84 U6.9 ; R5.2 3037.95,3007.64 3048.73,3018.42 3048.73,3021.37 3072.7,3045.34 3072.7,3050.3 3073.56,3051.15 3073.56,3056.85 v1(3075.86,3059.14) ; v1@3075,3060 3089,3074 3089,3175.91 3055,3209.91 3055,3295 3065.43,3305.43 U2.12
  L4 w6: v1(2835,3143.18) 2935.18,3043 3058,3043 3072.51,3057.51 3074.23,3057.51 v1(3075.86,3059.14)
SPI_MOSI: R4.2 U2.18 U6.24 | length 505.3
  L1 w6: v1(3055,3185.87) 3053.34,3184.21 U6.24 3022.76,3411.8 3065.06,3454.1 3092.33,3454.1 U2.18 ; v1@3135.74,3211.81 v1(3135,3211.08) 3189.44,3211.08 R4.2@3190.39,3212.03
  L4 w6: v1(3055,3185.87) 3115.87,3185.87 3120,3190 3120,3196.08 v1(3135,3211.08)
SPI_SCK: R3.2 U2.20 U6.23 | length 669.2
  L1 w6: U6.23 3059.32,3164.53 3068.84,3155 v1(3070,3155) ; U2.20 3100.07,3507.3 3128.93,3507.3 3135,3513.37 v1(3135,3540) ; v1(3106,3155) 3109.25,3155 3114.25,3150 R3.2@3190.39,3150
  L4 w6: v1(3070,3155) v1@3102.96,3155 ; v1(3106,3155) 3108.23,3157.23 3117.23,3157.23 3152,3192 3152,3258 3118,3292 3118,3523 v1(3135,3540)
pads on no net: J1.MH1 J1.MH2 U1.4 U6.2 U6.3 U6.4 U6.5 U6.6 U6.7 U6.14 U6.15 U6.16 U6.17 U6.19 U6.21 U6.22
copper on no net: | length 4.1
  L1 w8: 2974.53,3056.26 2977.42,3059.15

## Polygon pours and split planes (outlines as drawn)
3v3 on L3 "3V3_L03_P001" (solid, pour order 1): 2290,3850 3545,3850 3545,2600 2290,2600
GND on L2 "GND_L02_P000" (solid, pour order 0): 2290,3850 2290,2600 3545,2600 3545,3850
GND on L4 "GND_L04_P003" (solid, pour order 3): 2290,3850 3545,3850 3545,2600 2290,2600
GND on L1 "GND_L01_P002" (solid, pour order 2): 2290,3850 3545,3850 3545,2600 2290,2600

## Other copper
L1:
  pour cut-out: 2893.98,3187.99 2996.02,3187.99 2996.02,3082.96 2894.93,3082.96 2893.98,3082.01

## Silkscreen, mask and mechanical layers (free items; w line width, h text height)
Top Overlay:
  lines w10: 2755,3040 2765,3050 2765,3055
Bottom Overlay:
  drawing of 2 lines, arcs and shapes, not listed
  text "Remote IMU | Rev: 2 / (C) 2020 LeafLabs" at 3180,2925 h60
Mechanical 1:
  lines w9.84: 3254.41,3580.24 cw(c3254.41,3585.16) 3254.41,3590.08 ; 3254.41,3580.24 ccw(c3254.41,3585.16) 3254.41,3590.08 ; 3254.41,3580.24 cw(c3254.41,3585.16) 3254.41,3590.08 ; 3254.41,3580.24 ccw(c3254.41,3585.16) 3254.41,3590.08 ; 3333.15,3501.5 cw(c3333.15,3506.42) 3333.15,3511.34 ; 3333.15,3501.5 ccw(c3333.15,3506.42) 3333.15,3511.34 ; 3333.15,3501.5 cw(c3333.15,3506.42) 3333.15,3511.34 ; 3333.15,3501.5 ccw(c3333.15,3506.42) 3333.15,3511.34 ; 2289.84,2950.31 cw(c2289.84,2955.24) 2289.84,2960.16 cw(c2289.84,2955.24) 2289.84,2950.31 ; 2289.84,2954.25 cw(c2289.84,2959.17) 2289.84,2964.09 cw(c2289.84,2959.17) 2289.84,2954.25 ; 2289.84,3497.56 cw(c2289.84,3502.48) 2289.84,3507.4 cw(c2289.84,3502.48) 2289.84,3497.56 ; 2289.84,3501.5 cw(c2289.84,3506.42) 2289.84,3511.34 cw(c2289.84,3506.42) 2289.84,3501.5 ; 2368.58,2871.57 cw(c2368.58,2876.5) 2368.58,2881.42 cw(c2368.58,2876.5) 2368.58,2871.57 ; 2368.58,3580.24 cw(c2368.58,3585.16) 2368.58,3590.08 cw(c2368.58,3585.16) 2368.58,3580.24 ; 2372.52,2871.57 cw(c2372.52,2876.5) 2372.52,2881.42 cw(c2372.52,2876.5) 2372.52,2871.57 ; 2372.52,3580.24 cw(c2372.52,3585.16) 2372.52,3590.08 cw(c2372.52,3585.16) 2372.52,3580.24 ; 3250.47,2871.57 cw(c3250.47,2876.5) 3250.47,2881.42 cw(c3250.47,2876.5) 3250.47,2871.57 ; 3254.41,2871.57 cw(c3254.41,2876.5) 3254.41,2881.42 cw(c3254.41,2876.5) 3254.41,2871.57 ; 3333.15,2950.31 cw(c3333.15,2955.24) 3333.15,2960.16 cw(c3333.15,2955.24) 3333.15,2950.31 ; 3333.15,2954.25 cw(c3333.15,2959.17) 3333.15,2964.09 cw(c3333.15,2959.17) 3333.15,2954.25
  lines w19.68: 2289.84,2955.24 ccw(c2368.58,2955.24) 2368.58,2876.5 ; 2289.84,2959.17 2289.84,3502.48 ; 2289.84,3506.42 cw(c2368.58,3506.42) 2368.58,3585.16 ; 2372.52,2876.5 3250.47,2876.5 ; 2372.52,3585.16 3254.41,3585.16 cw(c3254.41,3506.42) 3333.15,3506.42 3333.15,2959.17 ; 3254.41,2876.5 ccw(c3254.41,2955.24) 3333.15,2955.24
Mechanical 2:
  lines w5.91: 3310.09,2896.61 ccw(c3310.09,2899.56) 3310.09,2902.51 ; 3310.09,2896.61 cw(c3310.09,2899.56) 3310.09,2902.51 ; 3310.09,2896.61 ccw(c3310.09,2899.56) 3310.09,2902.51 ; 3310.09,2896.61 cw(c3310.09,2899.56) 3310.09,2902.51 ; 3692.86,2513.83 ccw(c3692.86,2516.79) 3692.86,2519.74 ; 3692.86,2513.83 cw(c3692.86,2516.79) 3692.86,2519.74 ; 3692.86,2513.83 ccw(c3692.86,2516.79) 3692.86,2519.74 ; 3692.86,2513.83 cw(c3692.86,2516.79) 3692.86,2519.74 ; 3235.85,2933.72 ccw(c3235.85,2936.68) 3235.85,2939.63 ccw(c3235.85,2936.68) 3235.85,2933.72 ; 3254.41,2952.28 ccw(c3254.41,2955.24) 3254.41,2958.19 ccw(c3254.41,2955.24) 3254.41,2952.28 ; 3272.97,2970.84 ccw(c3272.97,2973.8) 3272.97,2976.75 ccw(c3272.97,2973.8) 3272.97,2970.84 ; 3692.86,2424.81 ccw(c3692.86,2427.76) 3692.86,2430.71 ccw(c3692.86,2427.76) 3692.86,2424.81
  lines w11.81: 3235.85,2936.68 3310.09,2899.56 3272.97,2973.8 ; 3254.41,2955.24 3692.86,2516.79 3692.86,2427.76
  lines w13.78: 2289.84,2325.31 2289.84,2870.59 ; 2368.58,2377.81 2289.84,2404.06 ; 2368.58,2430.3 2289.84,2404.06 ; 2543.78,2404.06 2289.84,2404.06 ; 3059.5,2404.06 3333.15,2404.06 ; 3254.41,2377.81 3333.15,2404.06 ; 3254.41,2430.3 3333.15,2404.06 ; 3333.15,2325.31 3333.15,2870.59 ; 3342.99,2876.5 3864.65,2876.5 ; 3342.99,3585.16 3864.65,3585.16 ; 3759.66,2955.24 3785.91,2876.5 ; 3759.66,3506.42 3785.91,3585.16 ; 3785.91,3047.23 3785.91,2876.5 ; 3785.91,3434.43 3785.91,3585.16 ; 3812.15,2955.24 3785.91,2876.5 ; 3812.15,3506.42 3785.91,3585.16
  text "18mm" at 3885.5,3509.5 h157.48 r270
  text "R 2.0mm" at 3680.63,2234.17 h157.48
  text "26.5mm" at 2385.5,2180.5 h157.48
  text "(All corners)" at 3680.63,2120 h118.11
Mechanical 3:
  lines w43.31: 2380.55,2977.95 ccw(c2380.55,2999.61) 2380.55,3021.26 ccw(c2380.55,2999.61) 2380.55,2977.95 ; 2380.55,3450.39 cw(c2380.55,3472.05) 2380.55,3493.7 cw(c2380.55,3472.05) 2380.55,3450.39 ; 3244.45,2976.3 cw(c3244.45,2997.95) 3244.45,3019.61 cw(c3244.45,2997.95) 3244.45,2976.3 ; 3244.45,3448.74 ccw(c3244.45,3470.39) 3244.45,3492.05 ccw(c3244.45,3470.39) 3244.45,3448.74

## Text inside footprints (layer, text, board x,y; h text height)
J1: Mechanical 2 "PCB Edge" at 2255,3293 h16 r270